# Altium PCB Sensor_Borad.PcbDoc
Units mil, origin at the board's own origin, x right, y up, seen from the top; angles counter-clockwise.
Board outline 1377.95 x 472.44 mil, 2 copper layers (Top Layer, Bottom Layer); 10 components, 7 nets, 40 pads, 15 vias.
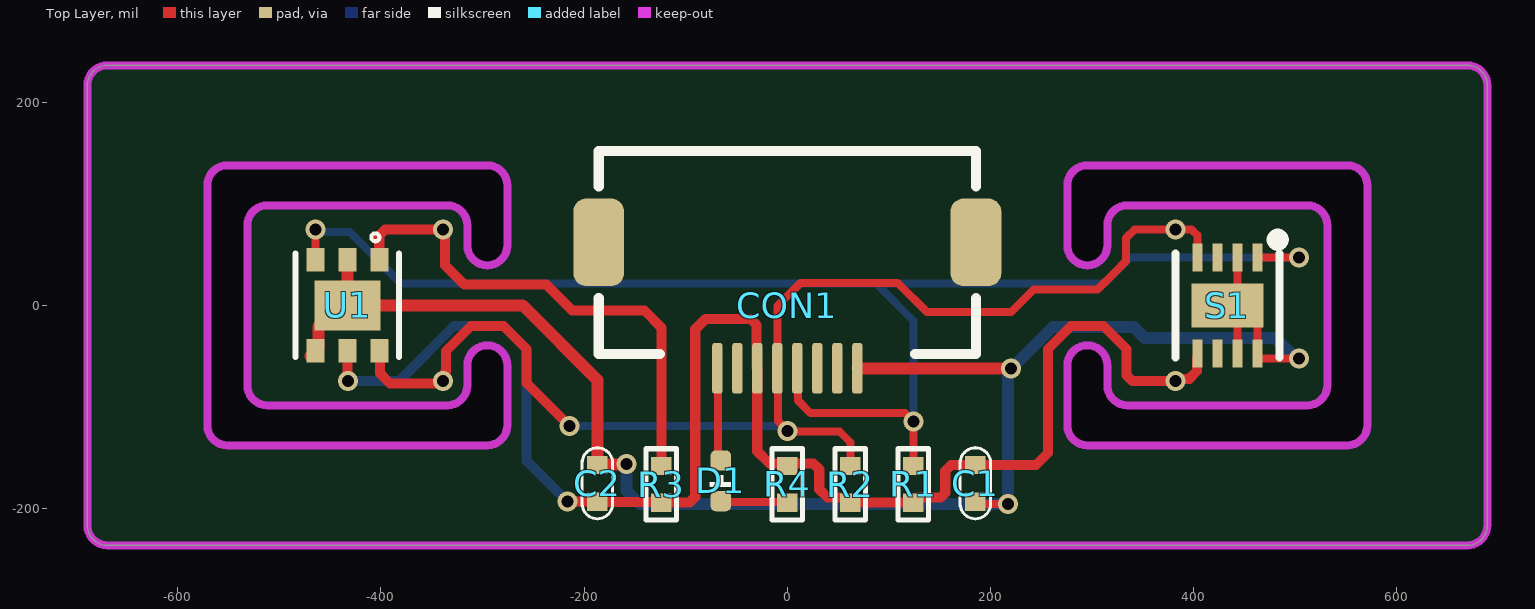
[diagram p0: Top Layer view]
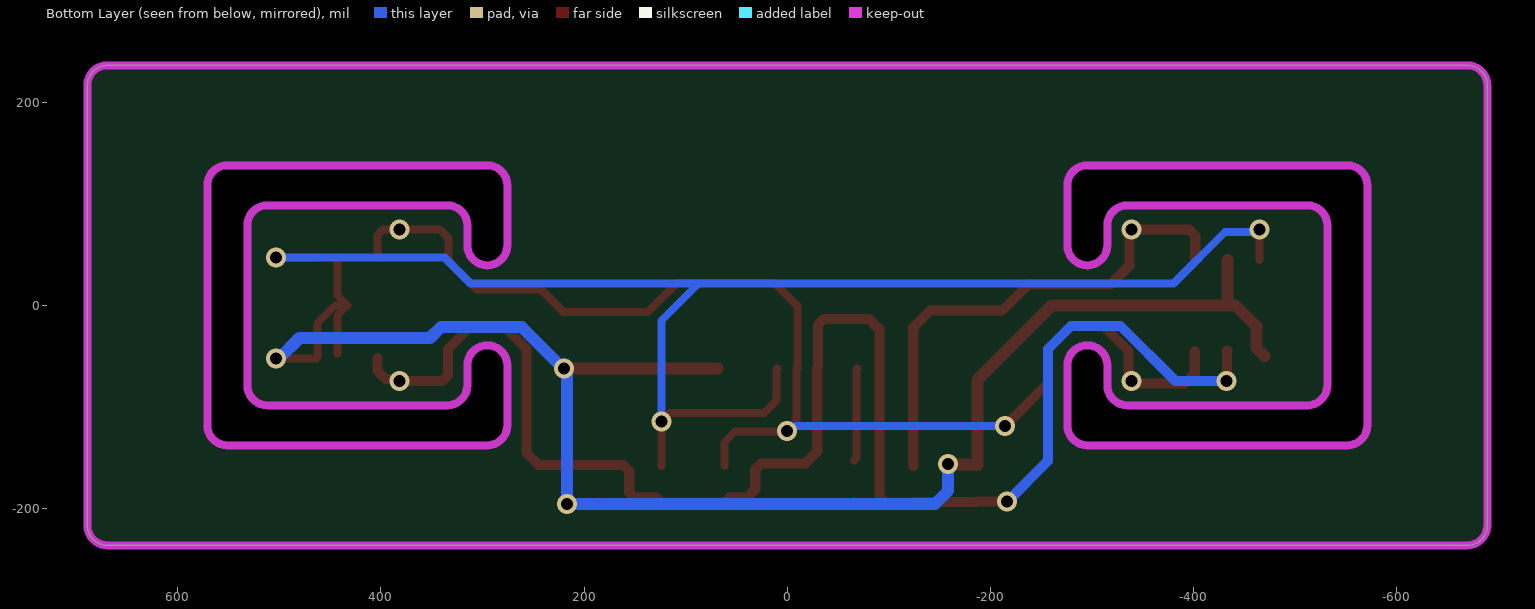
[diagram p1: Bottom Layer view, seen from below]
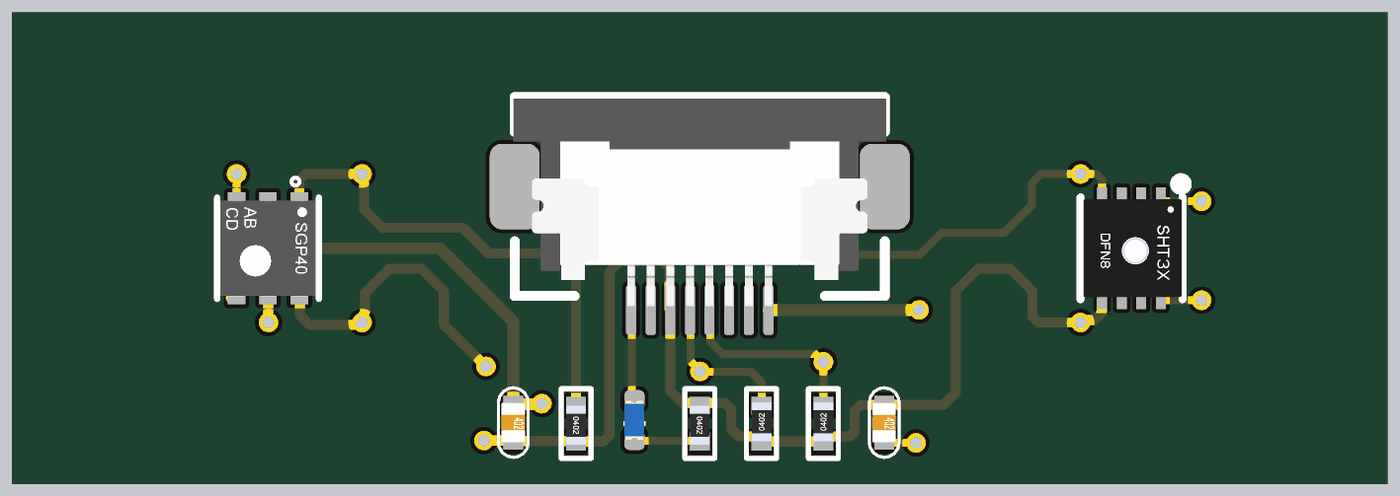
[diagram p2: 3D render of the assembled board from above, using the file's embedded part models]

## Layer stack, top to bottom
Top Solder: solder mask 0.4, Solder Resist, Dk 3.5
Top Layer: signal copper 1.4
Dielectric 1: dielectric 12.6, FR-4, Dk 4.8
Bottom Layer: signal copper 1.4
Bottom Solder: solder mask 0.4, Solder Resist, Dk 3.5

## Board outline
-688.98,-216.54 ccw(c-669.29,-216.54) -669.29,-236.22 669.29,-236.22 ccw(c669.29,-216.54) 688.98,-216.54 688.98,216.54 ccw(c669.29,216.54) 669.29,236.22 -669.29,236.22 -669.28,236.21 ccw(c-669.29,216.53) -688.98,216.54
cut-out: -570.87,-118.11 ccw(c-551.18,-118.11) -551.18,-137.8 -295.28,-137.8 ccw(c-295.28,-118.11) -275.59,-118.11 -275.59,-59.06 ccw(c-295.28,-59.06) -295.28,-39.37 ccw(c-295.28,-59.06) -314.96,-59.06 -314.96,-78.74 cw(c-334.65,-78.74) -334.65,-98.43 -511.81,-98.43 cw(c-511.81,-78.74) -531.5,-78.74 -531.5,78.74 cw(c-511.81,78.74) -511.81,98.43 -334.65,98.43 cw(c-334.65,78.74) -314.96,78.74 -314.96,59.06 ccw(c-295.28,59.05) -295.28,39.37 ccw(c-295.28,59.06) -275.59,59.06 -275.59,118.11 ccw(c-295.28,118.11) -295.28,137.8 -551.18,137.8 ccw(c-551.18,118.11) -570.87,118.11
cut-out: 275.59,-118.11 ccw(c295.28,-118.11) 295.28,-137.8 551.18,-137.8 ccw(c551.18,-118.11) 570.87,-118.11 570.87,118.11 ccw(c551.18,118.11) 551.18,137.8 295.28,137.8 ccw(c295.28,118.11) 275.59,118.11 275.59,59.06 ccw(c295.28,59.06) 295.28,39.37 ccw(c295.28,59.06) 314.96,59.06 314.96,78.74 cw(c334.65,78.74) 334.65,98.43 511.81,98.43 cw(c511.81,78.74) 531.5,78.74 531.5,-78.74 cw(c511.81,-78.74) 511.81,-98.43 334.65,-98.43 cw(c334.65,-78.74) 314.96,-78.74 314.96,-59.06 ccw(c295.28,-59.05) 295.28,-39.37 ccw(c295.28,-59.06) 275.59,-59.06

## Design rules (kind name [scope] priority, off if disabled: settings)
Clearance [All] p1: gap=6 ignorepadtopadclearanceinfootprint=FALSE
PolygonConnect [All] p1: connectstyle=Relief reliefconductorwidth=10 reliefentries=4 polygonreliefangle="90 Angle" airgapwidth=10
RoutingVias [All] p1: holewidth=28 width=50 viastyle="Through Hole" minholewidth=28 minwidth=50 maxholewidth=28 maxwidth=50
SolderMaskExpansion [All] p1: expansion=4 istentingtop=FALSE
Width [All] p1: maxlimit=78.74 minlimit=3.94 preferedwidth=10
30 further rules are at their usual default settings.

## Components (designator, comment, footprint, x,y, rotation, side; value= is the part's Value field where it differs from the comment)
C1 "0.1u" 0402_C 185.04,-175.2 r270 top
C2 "1u" 0402_C -187.01,-175.2 r270 top
CON1 "FFC_0.5_8" FFC_0.5_8 0,0 r90 top locked
D1 "RED" LED_0402_BLUE -65.49,-172.7 r90 top
R1 "10k" 0402_R 124.03,-176.2 r90 top
R2 "10k" 0402_R 62.02,-176.2 r90 top
R3 "4.7Ω" 0402_R -124,-176.2 r270 top
R4 "10K" 0402_R 0.02,-176.2 r270 top
S1 "SHT31-DIS-B" DFN8-P0.50 433.07,0 r180 top
U1 "SGP40-D-R4" DFN-6_L2.4-W2.4-P0.80-TL-EP -433.07,0 r270 top

## Footprints (in the part's own frame and the unit in brackets; to place one, negate y for a bottom-side part, rotate by r counter-clockwise, add the part's x,y. Pads: shape width x height; smd on the part's side, far side on the other; paste and mask are expansions set on the pad)
0402_C [mil]
  rect 18x20 smd: 1(-18,0) 2(18,0)
  silkscreen extent -35,-15 35,15, body extent -20,-12 20,12, height 8
0402_R [mil]
  rect 18x20 smd: 1(-18,0) 2(18,0)
  silkscreen extent -35,-15 35,15, body extent -18,-10 21,10, height 13
DFN8-P0.50 [mm]
  rect 0.25x0.7 smd: 1(-0.75,-1.2) 2(-0.25,-1.2) 3(0.25,-1.2) 4(0.75,-1.2) 5(0.75,1.2) 6(0.25,1.2) 7(-0.25,1.2) 8(-0.75,1.2)
  rect 1.8x1.1 smd: 9(0,0)
  silkscreen extent -1.39,-1.77 1.3,1.3, body extent -1.28,-1.25 1.23,1.25, height 0.9
DFN-6_L2.4-W2.4-P0.80-TL-EP [mm]
  rect 0.585x0.448 smd: 1(-1.137,0.8) 2(-1.137,0) 3(-1.137,-0.8) 4(1.137,-0.8) 5(1.137,0) 6(1.137,0.8)
  rect 1.25x1.65 smd: 7(0,0)
  silkscreen extent -1.8,-1.3 1.3,1.3, body extent -1.22,-1.22 1.22,1.22, height 0.85
FFC_0.5_8 [mil]
  rrect50% 86x50 smd: 0(62,185.63) 0(62,-185.63)
  rrect50% 50x10 smd: 1(-62,-68.9) 2(-62,-49.21) 3(-62,-29.53) 4(-62,-9.84) 5(-62,9.84) 6(-62,29.53) 7(-62,49.21) 8(-62,68.9)
  silkscreen extent -48,-186 152,186, body extent -60,-187 151,187, height 82
LED_0402_BLUE [mil]
  rrect50% 20x20 smd: 1(-20,0) 2(20,0)
  silkscreen extent -6,-10 6,10, body extent -20,-10 20,10, height 18

## Part data
CON1: "FFC", System=Connector
D1: library part LED0, "Typical INFRARED GaAs LED", LatestRevisionDate=08-Jul-2005, LatestRevisionNote="Mech Layer 1 removed.", PackageReference=LED-0, Published=8-Jun-2000, Publisher="Altium Limited"
R4: library part Res2, "Resistor", LatestRevisionDate=17-Jul-2002, LatestRevisionNote="Re-released for DXP Platform.", PackageReference=AXIAL-0.4, Published=8-Jun-2000, Publisher="Altium Limited"
S1: BOM_JLCPCB Part Class="Extended Part", BOM_Manufacturer=Sensirion, BOM_Manufacturer Part=SHT31-DIS-B, BOM_Supplier=LCSC, BOM_Supplier Part=C80862, spicePre=S, spiceSymbolName=SHT31-DIS-B
U1: BOM_JLCPCB Part Class="Extended Part", BOM_Manufacturer=null, BOM_Manufacturer Part=SGP40-D-R4, BOM_Supplier=LCSC, BOM_Supplier Part=C2874215, Contributor=LCSC, spicePre=U, spiceSymbolName=SGP40-D-R4
C1 C2: Contributor=LCEDA_Lib, nameAlias=Value(F), spicePre=C, spiceSymbolName=C_0402_US
R1 R2 R3: Contributor=LCEDA_Lib, nameAlias=Value(Ω), spicePre=R, spiceSymbolName=R_0402_EU

## Via types
v1: diameter 19.68, hole 11.81, Top Layer to Bottom Layer, 15 vias

## Nets (pads, with @x,y where several pads share a name; then routed paths per layer and width w, separated by ;. In a path a pad name is that pad's centre, name@x,y a point inside that pad or via, vN(x,y) a via of type N, cw(c..) or ccw(c..) an arc to the next point about the centre after c; other vN are vias at no path point)
GND: C1.2 C2.1 CON1.1 S1.2 S1.7 S1.8 S1.9 U1.2 U1.4 U1.7 | length 1756.3
  Top Layer w7.87: C1.2 187.46,-195.62 v1(216.96,-195.62) ; S1.7 442.91,-9.84 S1.9 ; S1.2 442.91,9.84 S1.9 ; v1(503.38,-52.26) 463.59,-52.26 462.6,-51.28 S1.8 462.6,-17.72 444.88,0 S1.9
  Top Layer w11.81: U1.4@-469.45,-49.66 -461.61,-41.83 -461.61,-20.67 -440.94,0 U1.7 ; U1.2 U1.7 ; v1(-158.35,-156.18) -158.85,-156.69 -186.5,-156.69 C2.1 -187.01,-73.54 -260.55,0 U1.7 ; CON1.1 v1(219.99,-62) v1@220.24,-61.75
  Bottom Layer w11.81: v1(-158.35,-156.18) -158.35,-182.4 -145.13,-195.62 v1(216.96,-195.62) 216.96,-65.87 261.34,-21.5 341.04,-21.5 351.72,-32.18 480.1,-32.18 500.18,-52.26 v1(503.38,-52.26)
LED: CON1.8 D1.2 | length 92.1
  Top Layer w7.87: CON1.8 -68.15,-62.75 -68.15,-150.04 D1.2
NetD1_1: D1.1 R4.2 | length 66.1
  Top Layer w7.87: D1.1 -64.74,-193.45 -0.73,-193.45 R4.2
NetR3_1: R3.1 U1.1 | length 499.9
  Top Layer w10: U1.1 -401.57,68.79 -395.72,74.65 v1(-338.74,74.65) -336.89,72.79 -336.89,39.43 -317.89,20.43 -237.35,20.43 -211.77,-5.15 -140.63,-5.15 -124,-21.78 R3.1
SCL: CON1.5 R2.2 S1.4 U1.6 | length 1250.6
  Top Layer w7.87: R2.2 62.02,-134.86 51.18,-124.02 1.2,-124.02 -9.09,-113.72 -9.09,-62.75 CON1.5 -9.84,-0.71 12.9,22.03 108.64,22.03 137.35,-6.68 220.39,-6.68 242.56,15.5 305.29,15.5 322.39,32.59 333.39,43.59 333.39,66.14 341.9,74.65 v1(381.94,74.65) 397.93,74.65 403.54,69.04 S1.4
  Top Layer w10: U1.6@-400.97,-45.39 -400.97,-66.98 -391.04,-76.91 -343.62,-76.91 -341.36,-74.65 v1(-338.74,-74.65) -336.89,-72.79 -336.89,-65.94 -335.87,-64.93 -335.87,-45.03 -311.27,-20.43 -279.28,-20.43 -256.65,-43.06 -256.65,-76.5 v1(-214.34,-118.82)
  Bottom Layer w7.87: v1(-214.34,-118.82) -7.97,-118.82 -2.98,-123.8 v1(0.21,-123.8)
SDA: CON1.4 R1.2 S1.1 U1.3 | length 1418.3
  Top Layer w7.87: U1.3 v1(-464.57,74.65) ; CON1.4 10.59,-62.75 10.59,-93.81 22.92,-106.14 115.98,-106.14 v1(124.03,-114.19) R1.2 ; S1.1 462.66,47.18 v1(503.38,47.18)
  Bottom Layer w7.87: v1(-464.57,74.65) -462.31,72.39 -430.95,72.39 -380.61,22.05 ; -380.06,21.5 311.82,21.5 337.5,47.18 v1(503.38,47.18) ; 88.13,20.71 124.03,-15.19 v1(124.03,-114.19)
VCC_3.3V: C1.1 C2.2 CON1.6 R1.1 R2.1 R3.2 R4.1 S1.5 U1.5 | length 1554.5
  Top Layer w10: U1.5 -432.79,-45.07 -432.79,-74.36 v1(-432.5,-74.65) ; v1(-216.43,-193.3) v1(-216.43,-193.3) -187.06,-193.25 C2.2 -186.51,-193.7 -124.5,-193.7 R3.2 -96.49,-194.2 -90.63,-188.34 -90.63,-23.52 -80.44,-13.33 -36.23,-13.33 -30.27,-19.28 -30.27,-61.25 CON1.6 -29.53,-143.7 -17.61,-155.61 25.64,-155.61 31.5,-161.47 31.5,-181.1 39.53,-189.13 56.96,-189.13 R2.1 R1.1 129.09,-189.13 150.9,-189.13 155.51,-184.52 155.51,-163.05 161.37,-157.2 C1.1 244.81,-157.2 256.65,-145.35 256.65,-43.06 279.28,-20.43 311.27,-20.43 333.9,-43.06 333.9,-68.79 339.76,-74.65 v1(381.94,-74.65) ; v1@381.46,-74.16 383.23,-72.39 395.54,-72.39 403.29,-64.63 S1.5@403.29,-51.78
  Bottom Layer w10: v1(-432.5,-74.65) -382.22,-74.65 -328,-20.43 -279.28,-20.43 -256.65,-43.06 -256.65,-153.08 v1(-216.43,-193.3)
pads on no net: CON1.0 CON1.2 CON1.3 CON1.7 S1.3 S1.6

## Keep-outs
Keep-Out Layer:
  lines w7.87: -688.98,-216.54 ccw(c-669.29,-216.54) -669.29,-236.22 669.29,-236.22 ccw(c669.29,-216.54) 688.98,-216.54 688.98,216.54 ccw(c669.29,216.54) 669.29,236.22 -669.29,236.22 ccw(c-669.29,216.53) -688.98,216.54 -688.98,-216.54 ; -570.87,-118.11 ccw(c-551.18,-118.11) -551.18,-137.8 -295.28,-137.8 ccw(c-295.28,-118.11) -275.59,-118.11 -275.59,-59.06 ccw(c-295.28,-59.06) -295.28,-39.37 ccw(c-295.28,-59.06) -314.96,-59.06 -314.96,-78.74 cw(c-334.65,-78.74) -334.65,-98.43 -511.81,-98.43 cw(c-511.81,-78.74) -531.5,-78.74 -531.5,0 -531.5,78.74 cw(c-511.81,78.74) -511.81,98.43 -334.65,98.43 cw(c-334.65,78.74) -314.96,78.74 -314.96,59.06 ccw(c-295.28,59.06) -295.28,39.37 ccw(c-295.28,59.06) -275.59,59.06 -275.59,118.11 ccw(c-295.28,118.11) -295.28,137.8 -551.18,137.8 ccw(c-551.18,118.11) -570.87,118.11 -570.87,0 -570.87,-118.11 ; 275.59,-118.11 ccw(c295.28,-118.11) 295.28,-137.8 551.18,-137.8 ccw(c551.18,-118.11) 570.87,-118.11 570.87,0 570.87,118.11 ccw(c551.18,118.11) 551.18,137.8 295.28,137.8 ccw(c295.28,118.11) 275.59,118.11 275.59,59.06 ccw(c295.28,59.06) 295.28,39.37 ccw(c295.28,59.06) 314.96,59.06 314.96,78.74 cw(c334.65,78.74) 334.65,98.43 511.81,98.43 cw(c511.81,78.74) 531.5,78.74 531.5,0 531.5,-78.74 cw(c511.81,-78.74) 511.81,-98.43 334.65,-98.43 cw(c334.65,-78.74) 314.96,-78.74 314.96,-59.06 ccw(c295.28,-59.06) 295.28,-39.37 ccw(c295.28,-59.06) 275.59,-59.06 275.59,-118.11